# Altium PCB J201M1_VOL_CONV.PcbDoc
Units mm, origin at the board's own origin, x right, y up, seen from the top; angles counter-clockwise.
Board outline 59.49 x 67.82 mm, 2 copper layers (Top Layer, Bottom Layer); 3 components, 3 nets, 11 pads, 44 vias.
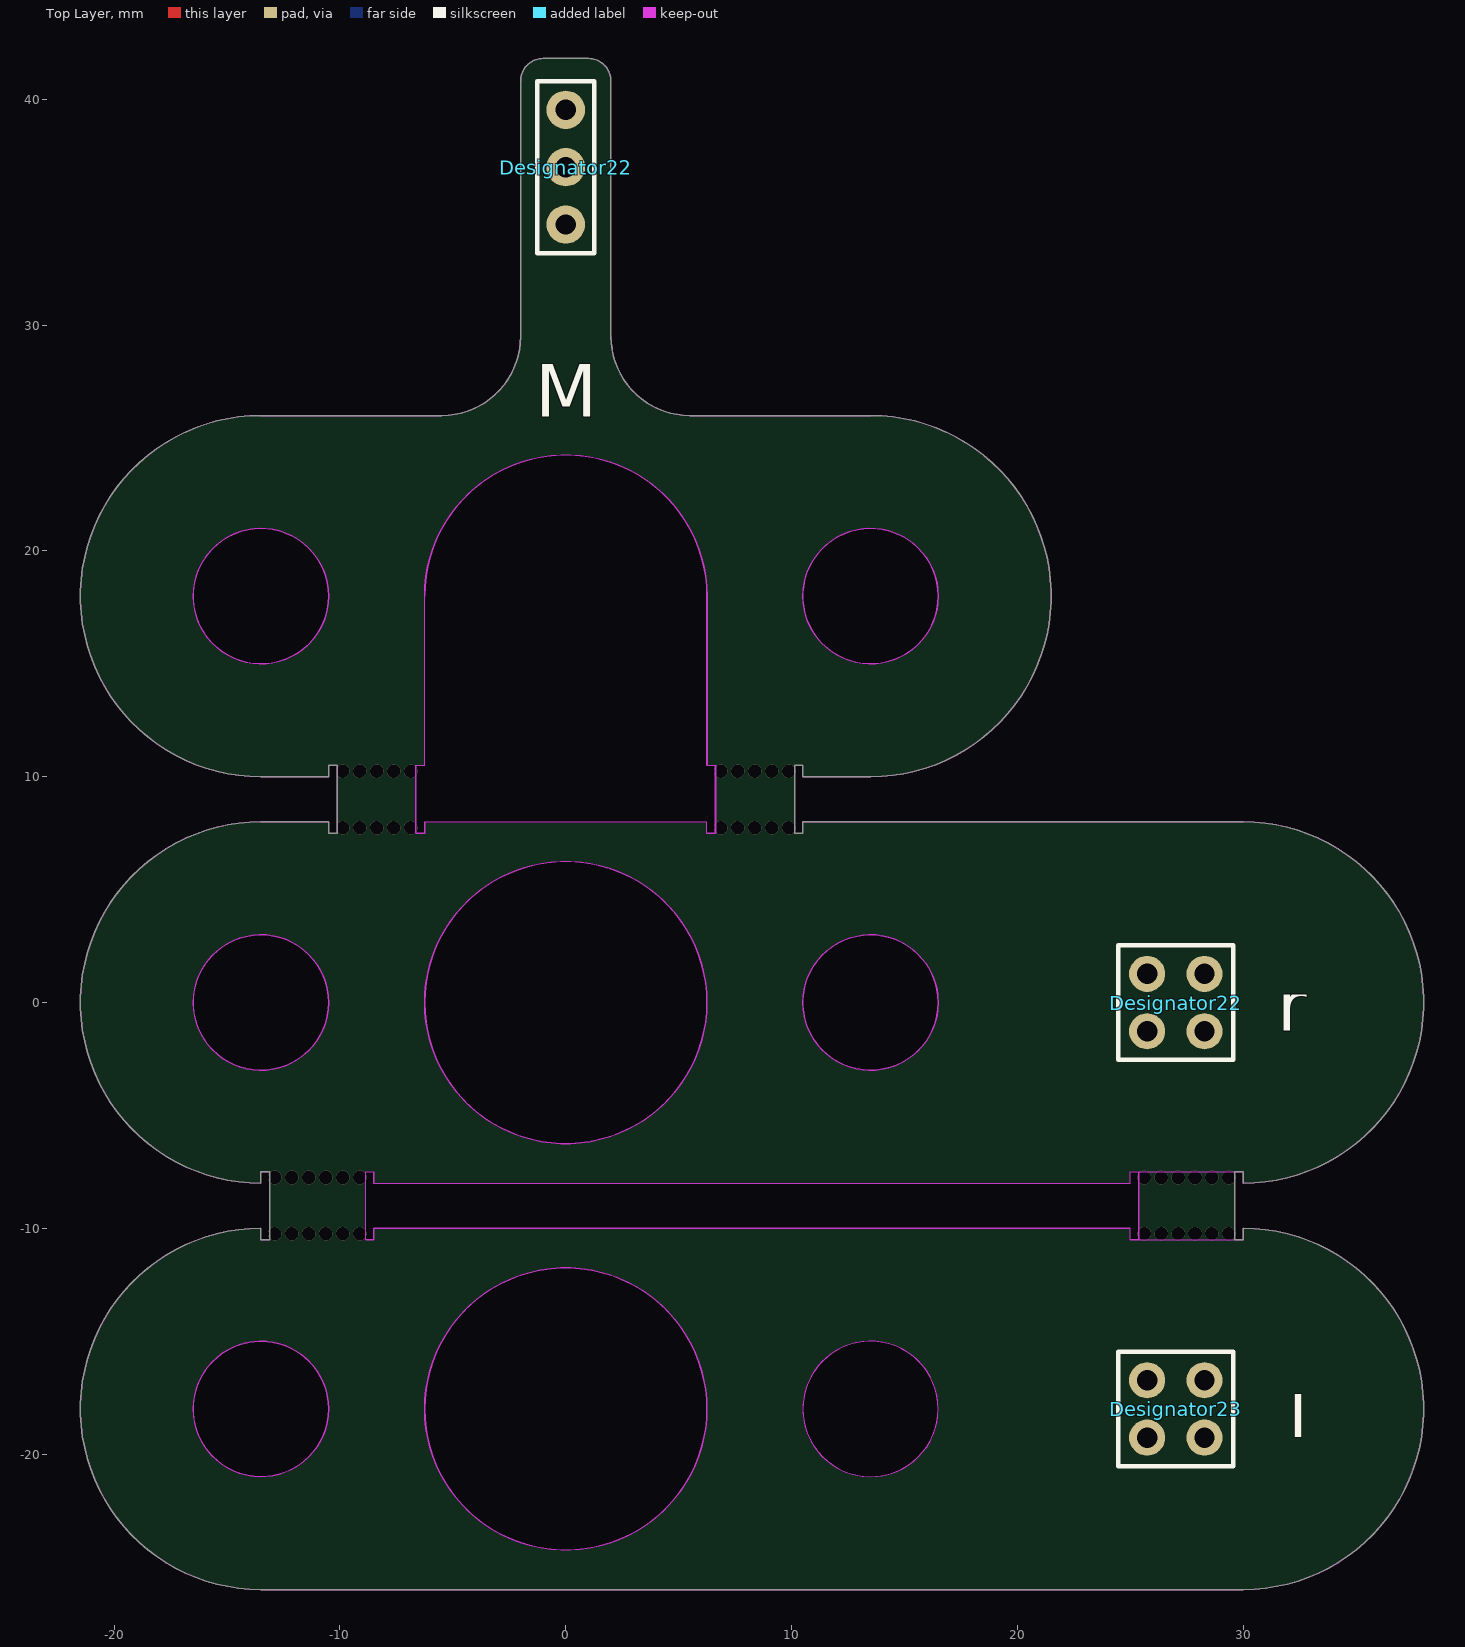
[diagram p0: Top Layer view]
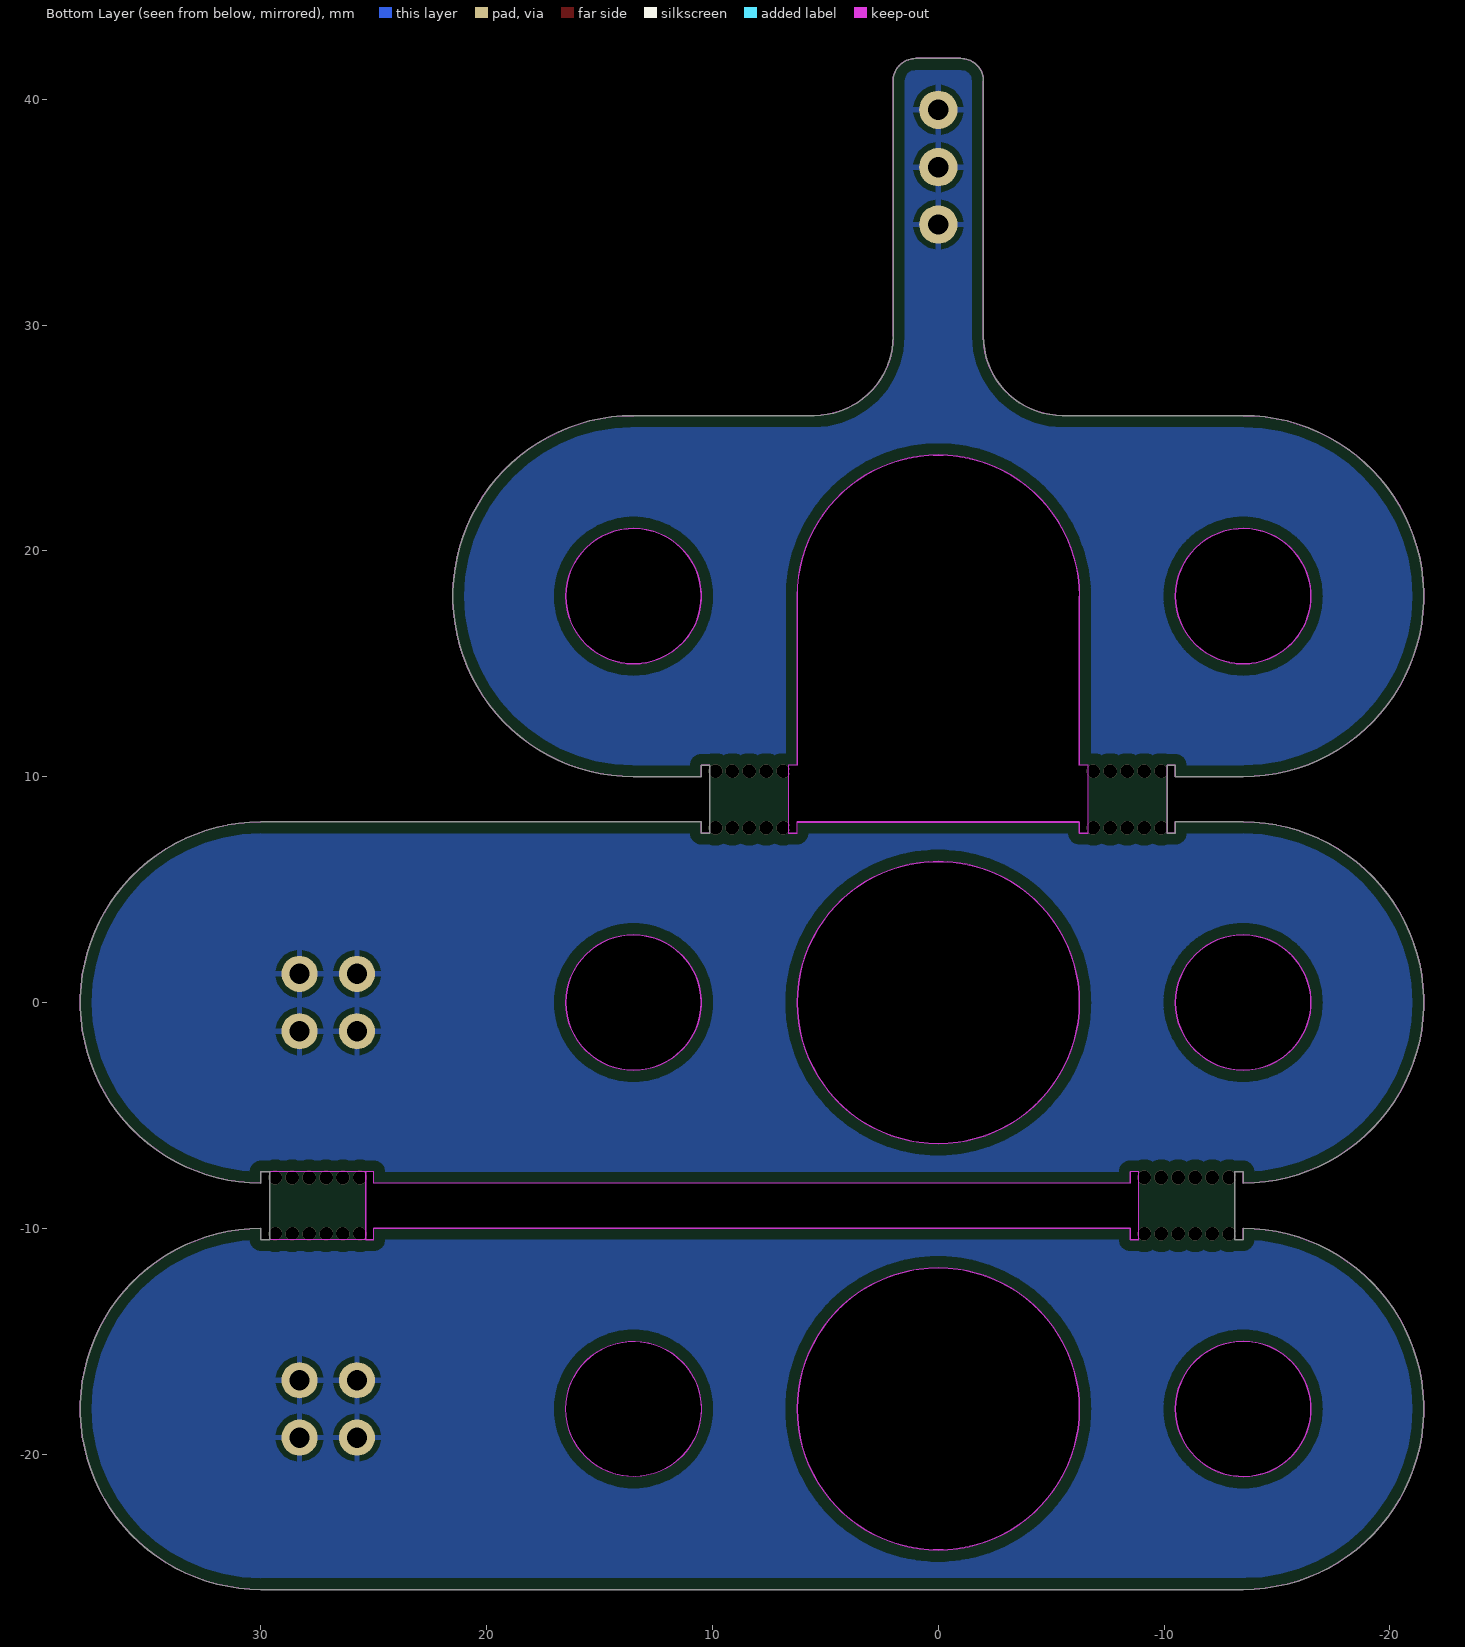
[diagram p1: Bottom Layer view, seen from below]
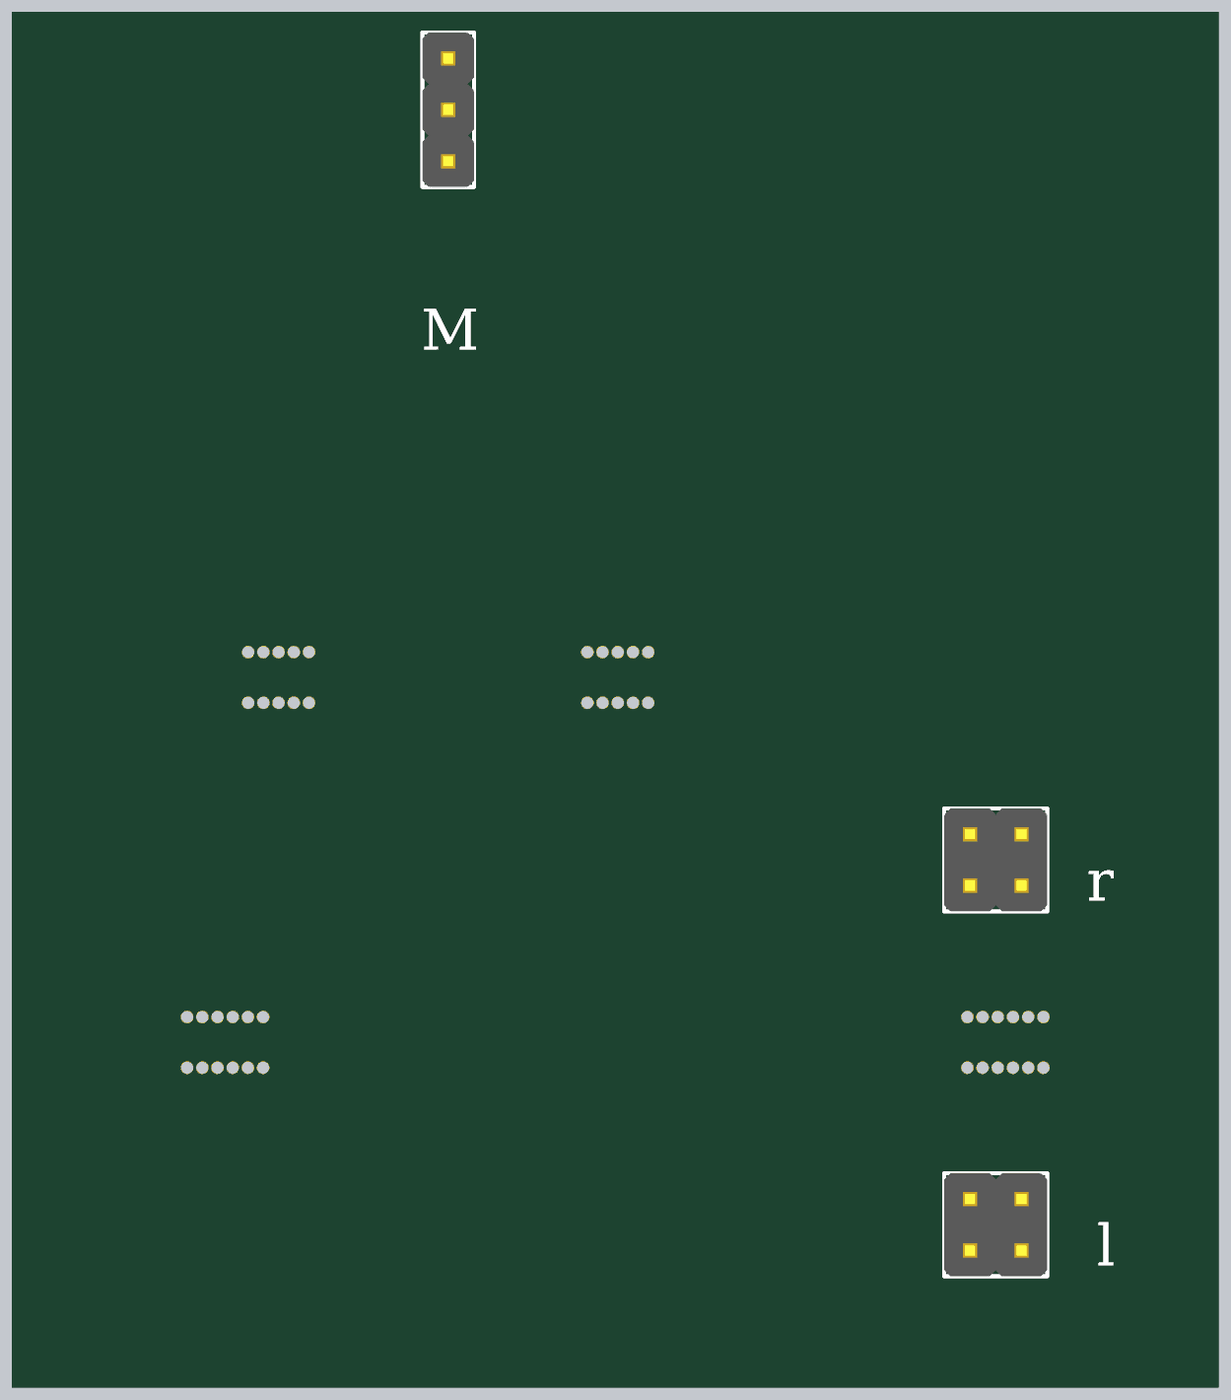
[diagram p2: 3D render of the assembled board from above, using the file's embedded part models]

## Layer stack, top to bottom
Top Solder: solder mask 0.0102, Solder Resist, Dk 3.5
Top Layer: signal copper 0.0356
Dielectric 1: dielectric 0.32, FR-4, Dk 4.8
Bottom Layer: signal copper 0.0356
Bottom Solder: solder mask 0.0102, Solder Resist, Dk 3.5

## Board outline
-13.5,-26 cw(c-13.5,-18) -13.5,-10 -13.5,-10.5 -13.119,-10.5 -13.119,-7.5 -13.5,-7.5 -13.5,-8 cw(c-13.5,0) -13.5,8 -10.5,8 -10.5,7.5 -10.131,7.5 -10.131,10.5 -10.5,10.5 -10.5,10 -13.5,10 cw(c-13.5,18) -13.5,26 -5.5,26 ccw(c-5.5,29.5) -2,29.5 -2,40.815 cw(c-1,40.815) -1,41.815 1,41.815 cw(c1,40.815) 2,40.815 2,29.5 ccw(c5.5,29.5) 5.5,26 13.5,26 cw(c13.5,18) 13.5,10 10.5,10 10.5,10.5 10.131,10.5 10.131,7.5 10.5,7.5 10.5,8 30,8 cw(c30,0) 30,-8 30,-7.5 29.619,-7.5 29.619,-10.5 30,-10.5 30,-10 cw(c30,-18) 30,-26
cut-out: -13.5,-21 cw(c-13.5,-18) -16.5,-18 cw(c-13.5,-18) -13.5,-15 cw(c-13.5,-18) -10.5,-18 cw(c-13.5,-18)
cut-out: 0,-24.25 cw(c0,-18) -6.25,-18 cw(c0,-18) 0,-11.75 cw(c0,-18) 6.25,-18 cw(c0,-18)
cut-out: 10.5,-18 ccw(c13.5,-18) 13.5,-21 ccw(c13.5,-18) 16.5,-18 ccw(c13.5,-18) 13.5,-15 ccw(c13.5,-18)
cut-out: -13.5,15 cw(c-13.5,18) -16.5,18 cw(c-13.5,18) -13.5,21 cw(c-13.5,18) -10.5,18 cw(c-13.5,18)
cut-out: 13.5,15 cw(c13.5,18) 10.5,18 cw(c13.5,18) 13.5,21 cw(c13.5,18) 16.5,18 cw(c13.5,18)
cut-out: -6.638,7.5 -6.638,10.5 -6.631,10.507 -6.257,10.507 -6.257,18 cw(c0,18) 6.257,18 6.257,10.507 6.631,10.507 6.638,10.5 6.638,7.5 6.631,7.493 6.25,7.493 6.243,7.5 6.243,7.993 -6.243,7.993 -6.243,7.5 -6.25,7.493
cut-out: -13.5,-3 cw(c-13.5,0) -16.5,0 cw(c-13.5,0) -13.5,3 cw(c-13.5,0) -10.5,0 cw(c-13.5,0)
cut-out: 0,-6.25 cw(c0,0) -6.25,0 cw(c0,0) 0,6.25 cw(c0,0) 6.25,0 cw(c0,0)
cut-out: 13.5,-3 cw(c13.5,0) 10.5,0 cw(c13.5,0) 13.5,3 cw(c13.5,0) 16.5,0 cw(c13.5,0)
cut-out: -8.869,-10.5 -8.869,-7.5 -8.5,-7.5 -8.5,-8 25,-8 25,-7.5 25.369,-7.5 25.369,-10.5 25,-10.5 25,-10 -8.5,-10 -8.5,-10.5

## Design rules (kind name [scope] priority, off if disabled: settings)
Clearance [All] p1: gap=0.5 ignorepadtopadclearanceinfootprint=FALSE
PolygonConnect [All] p1: connectstyle=Relief reliefconductorwidth=0.254 reliefentries=4 polygonreliefangle="90 Angle" airgapwidth=0.254
RoutingVias [All] p1: holewidth=0.711 width=1.27 viastyle="Through Hole" minholewidth=0.711 minwidth=1.27 maxholewidth=0.711 maxwidth=1.27
SolderMaskExpansion [All] p1: expansion=0.102 istentingtop=FALSE
Width [All] p1: maxlimit=0.254 minlimit=0.254 preferedwidth=0.254
30 further rules are at their usual default settings.

## Components (designator, comment, footprint, x,y, rotation, side; value= is the part's Value field where it differs from the comment)
Designator22 "Comment" HDR-1X3 0,34.46 r90 top
Designator22 "Comment" HDR-2X2 25.75,-1.27 r0 top
Designator23 "Comment" HDR-2X2 25.75,-19.27 r0 top

## Footprints (in the part's own frame and the unit in brackets; to place one, negate y for a bottom-side part, rotate by r counter-clockwise, add the part's x,y. Pads: shape width x height; smd on the part's side, far side on the other; paste and mask are expansions set on the pad)
HDR-1X3 [mm] "排针，3脚"
  round 1.7 hole 0.9: 1(0,0) 2(2.54,0) 3(5.08,0)
  silkscreen extent -1.27,-1.27 6.35,1.27, body extent -1.27,-1.27 6.35,1.27, height 8.5
HDR-2X2 [mm] "双排排针，2x2脚"
  round 1.6 hole 0.9: 1(0,0) 2(0,2.54) 3(2.54,0) 4(2.54,2.54)
  silkscreen extent -1.27,-1.27 3.81,3.81, body extent -1.27,-1.27 3.81,3.81, height 8.5

## Via types
v1: diameter 0.6, hole 0.6, Top Layer to Bottom Layer, tented both sides, 44 vias

## Nets (pads, with @x,y where several pads share a name; then routed paths per layer and width w, separated by ;. In a path a pad name is that pad's centre, name@x,y a point inside that pad or via, vN(x,y) a via of type N, cw(c..) or ccw(c..) an arc to the next point about the centre after c; other vN are vias at no path point)
1: Designator23.1 Designator23.2 Designator23.3 Designator23.4
2: Designator22.1@25.75,-1.27 Designator22.2@25.75,1.27 Designator22.3@28.29,-1.27 Designator22.4
3: Designator22.1@0,34.46 Designator22.2@0,37 Designator22.3@0,39.54
copper on no net:
  other v1: -12.881,-10.25 -12.131,-10.25 -11.381,-10.25 -10.631,-10.25 -9.881,-10.25 -9.131,-10.25 25.619,-10.25 26.369,-10.25 27.119,-10.25 27.869,-10.25 28.619,-10.25 29.369,-10.25 -12.881,-7.75 -12.131,-7.75 -11.381,-7.75 -10.631,-7.75 -9.881,-7.75 -9.131,-7.75 25.619,-7.75 26.369,-7.75 27.119,-7.75 27.869,-7.75 28.619,-7.75 29.369,-7.75 -9.869,7.75 -9.119,7.75 -8.369,7.75 -7.619,7.75 -6.869,7.75 6.869,7.75 7.619,7.75 8.369,7.75 9.119,7.75 9.869,7.75 -9.869,10.25 -9.119,10.25 -8.369,10.25 -7.619,10.25 -6.869,10.25 6.869,10.25 7.619,10.25 8.369,10.25 9.119,10.25 9.869,10.25

## Polygon pours and split planes (outlines as drawn)
3 on Bottom Layer "3_L02_P001" (solid, remove dead copper, pour order 1): -21.5,10 21.5,10 21.5,42 -21.5,42
1 on Bottom Layer "1_L02_P004" (solid, remove dead copper, pour order 4): -22,-26 38,-26 38,-10 -22,-10
2 on Bottom Layer "2_L02_P002" (solid, remove dead copper, pour order 2): -22,-8 38,-8 38,8 -22,8

## Keep-outs
Keep-Out Layer:
  circle w0.013: c13.5,0 r3
  circle w0.013: c0,0 r6.25
  circle w0.013: c-13.5,0 r3
  circle w0.013: c-13.5,-18 r3
  circle w0.013: c0,-18 r6.25
  circle w0.013: c13.5,-18 r3
  circle w0.013: c13.5,18 r3
  circle w0.013: c-13.5,18 r3
  lines w0.013: 25.369,-9.869 25.369,-7.5 ; 25.369,-8.131 25.369,-10.5 ; 29.619,-9.881 29.619,-7.5 ; 29.619,-8.119 29.619,-10.5 ; -13.5,-10.5 -13.119,-10.5 ; -13.5,-10.5 -13.5,-10.5 ; -13.5,-10.5 -13.5,-10 ccw(c-13.5,-18) -13.5,-26 30,-26 ccw(c30,-18) 30,-10 ; -13.5,-7.5 -13.119,-7.5 ; -13.5,-7.5 -13.5,-7.5 ; -13.5,-7.5 -13.5,-8 cw(c-13.5,0) -13.5,8 -10.5,8 ; -13.119,-10.5 -13.119,-10.5 ; -13.119,-10.5 -13.119,-7.5 ; -13.119,-7.5 -13.119,-7.5 ; -10.5,8 -10.5,8 ; -10.5,8 -10.5,7.5 -10.131,7.5 -10.131,10.5 -10.5,10.5 -10.5,10 -13.5,10 cw(c-13.5,18) -13.5,26 -5.5,26 ccw(c-5.5,29.5) -2,29.5 -2,40.815 cw(c-1,40.815) -1,41.815 1,41.815 cw(c1,40.815) 2,40.815 2,29.5 ccw(c5.5,29.5) 5.5,26 13.5,26 cw(c13.5,18) 13.5,10 10.5,10 10.5,10.5 10.131,10.5 10.131,7.5 10.5,7.5 10.5,8 ; -8.5,-10 -8.5,-10.5 -8.869,-10.5 -8.869,-7.5 -8.5,-7.5 -8.5,-8 25,-8 ; -8.5,-10 25,-10 ; -8.5,-10 -8.5,-10 ; -6.631,7.5 -6.631,10.5 -6.25,10.5 -6.25,18 cw(c0,18) 6.25,18 6.25,10.5 6.631,10.5 6.631,7.5 ; -6.631,7.5 -6.25,7.5 ; -6.631,7.5 -6.631,7.5 ; -6.25,7.5 -6.25,8 6.25,8 6.25,7.5 ; -6.25,7.5 -6.25,7.5 ; 6.25,7.5 6.25,7.5 ; 6.25,7.5 6.631,7.5 ; 6.631,7.5 6.631,7.5 ; 10.5,8 10.5,8 ; 10.5,8 30,8 cw(c30,0) 30,-8 ; 25,-10.5 25.369,-10.5 ; 25,-10.5 25,-10 ; 25,-10.5 25.369,-10.5 ; 25,-10.5 25,-10 ; 25,-8 25,-7.5 ; 25,-8 25,-8 ; 25,-8 25,-7.5 ; 25,-7.5 25.369,-7.5 ; 25,-7.5 25.369,-7.5 ; 25.369,-10.5 25.369,-7.5 ; 25.369,-10.5 29.619,-10.5 ; 25.369,-7.5 29.619,-7.5 ; 29.619,-10.5 29.619,-7.5 ; 29.619,-10.5 30,-10.5 ; 29.619,-10.5 29.619,-10.5 ; 29.619,-10.5 30,-10.5 ; 29.619,-10.5 29.619,-10.5 ; 29.619,-7.5 30,-7.5 ; 29.619,-7.5 29.619,-7.5 ; 29.619,-7.5 30,-7.5 ; 29.619,-7.5 29.619,-7.5 ; 30,-10.5 30,-10 ; 30,-10.5 30,-10.5 ; 30,-10.5 30,-10 ; 30,-10.5 30,-10.5 ; 30,-8 30,-7.5 ; 30,-8 30,-7.5 ; 30,-7.5 30,-7.5 ; 30,-7.5 30,-7.5

## Silkscreen, mask and mechanical layers (free items; w line width, h text height)
Top Overlay:
  text "M" at -1.344,25.165 h4
  text "r" at 31.504,-2 h4
  text "l" at 32.004,-20 h4
Bottom Solder:
  region: -13.5,11.2 cw(c-13.5,18) -13.5,24.8 13.5,24.8 cw(c13.5,18) 13.5,11.2
  region: -13.5,-6.8 cw(c-13.5,0) -13.5,6.8 13.5,6.8 cw(c13.5,0) 13.5,-6.8
  region: -13.5,-24.8 cw(c-13.5,-18) -13.5,-11.2 13.5,-11.2 cw(c13.5,-18) 13.5,-24.8
Mechanical 1:
  circle w0.013: c-13.5,18 r3
  circle w0.013: c13.5,18 r3
  circle w0.013: c13.5,-18 r3
  circle w0.013: c0,-18 r6.25
  circle w0.013: c-13.5,-18 r3
  circle w0.013: c-13.5,0 r3
  circle w0.013: c0,0 r6.25
  circle w0.013: c13.5,0 r3
  lines w0.013: -13.5,-10.5 -13.5,-10 ccw(c-13.5,-18) -13.5,-26 30,-26 ccw(c30,-18) 30,-10 30,-10.5 ; -13.5,-10.5 -13.5,-10.5 ; -13.5,-10.5 -13.119,-10.5 ; -13.5,-7.5 -13.5,-8 cw(c-13.5,0) -13.5,8 -10.5,8 ; -13.5,-7.5 -13.5,-7.5 ; -13.5,-7.5 -13.119,-7.5 ; -13.119,-10.5 -13.119,-7.5 ; -13.119,-10.5 -13.119,-10.5 ; -13.119,-7.5 -13.119,-7.5 ; -10.5,8 -10.5,7.5 -10.131,7.5 -10.131,10.5 -10.5,10.5 -10.5,10 -13.5,10 cw(c-13.5,18) -13.5,26 -5.5,26 ccw(c-5.5,29.5) -2,29.5 -2,40.815 cw(c-1,40.815) -1,41.815 1,41.815 cw(c1,40.815) 2,40.815 2,29.5 ccw(c5.5,29.5) 5.5,26 13.5,26 cw(c13.5,18) 13.5,10 10.5,10 10.5,10.5 10.131,10.5 10.131,7.5 10.5,7.5 10.5,8 ; -10.5,8 -10.5,8 ; -8.5,-10 -8.5,-10 ; -8.5,-10 25,-10 25,-10.5 25.369,-10.5 25.369,-7.5 25,-7.5 25,-8 ; -8.5,-10 -8.5,-10.5 -8.869,-10.5 -8.869,-7.5 -8.5,-7.5 -8.5,-8 25,-8 ; -6.631,7.5 -6.631,7.5 ; -6.631,7.5 -6.25,7.5 ; -6.631,7.5 -6.631,10.5 -6.25,10.5 -6.25,18 cw(c0,18) 6.25,18 6.25,10.5 6.631,10.5 6.631,7.5 ; -6.25,7.5 -6.25,7.5 ; -6.25,7.5 -6.25,8 6.25,8 6.25,7.5 ; 6.25,7.5 6.631,7.5 ; 6.25,7.5 6.25,7.5 ; 6.631,7.5 6.631,7.5 ; 10.5,8 30,8 cw(c30,0) 30,-8 30,-7.5 ; 10.5,8 10.5,8 ; 25,-8 25,-8 ; 29.619,-10.5 29.619,-10.5 ; 29.619,-10.5 30,-10.5 ; 29.619,-10.5 29.619,-7.5 ; 29.619,-7.5 29.619,-7.5 ; 29.619,-7.5 30,-7.5 ; 30,-10.5 30,-10.5 ; 30,-7.5 30,-7.5